# Altium PCB Liniar Power Source.PcbDoc
Units mil, origin at the board's own origin, x right, y up, seen from the top; angles counter-clockwise.
Board outline 3750 x 3500 mil, 2 copper layers (Top Layer, Bottom Layer); 28 components, 11 nets, 66 pads, 6 vias.
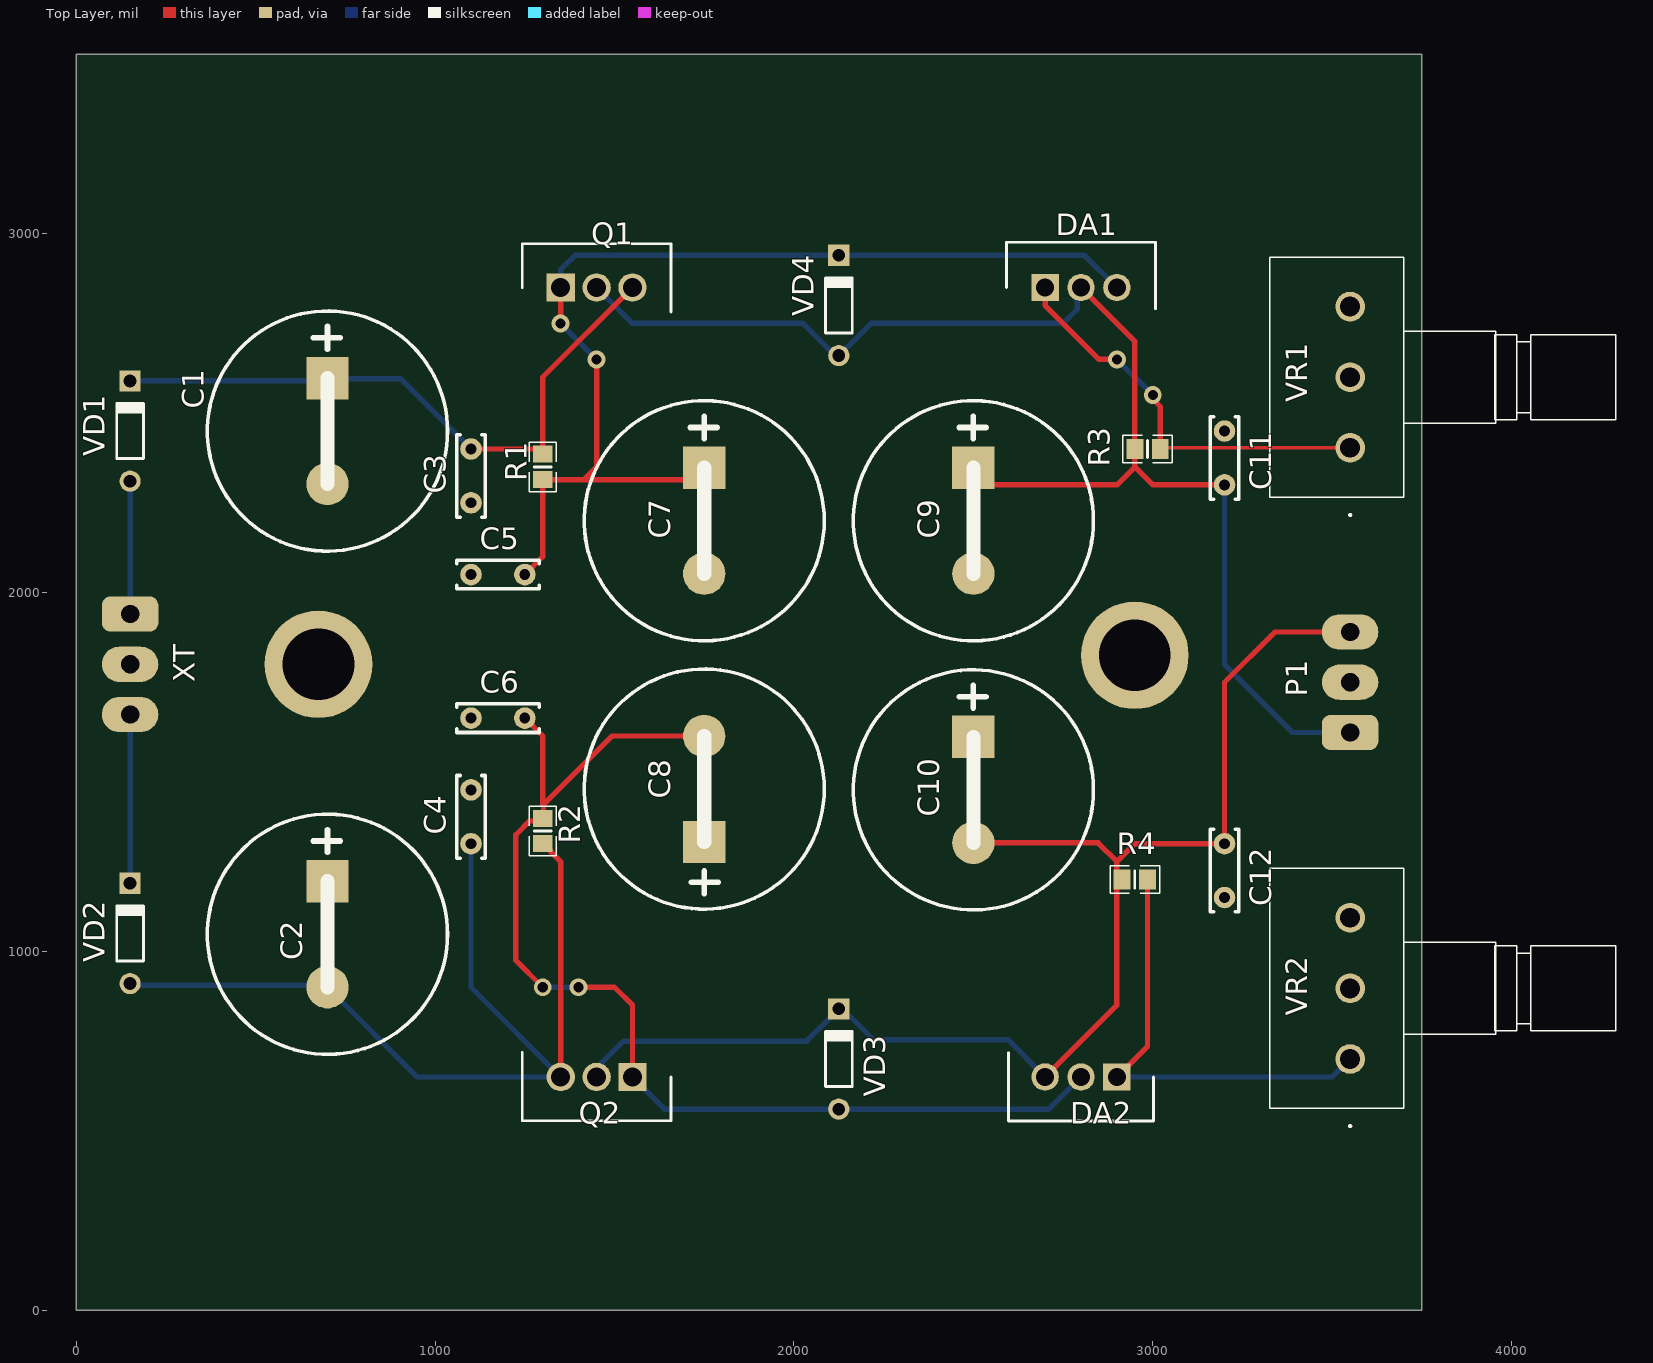
[diagram p0: Top Layer view]
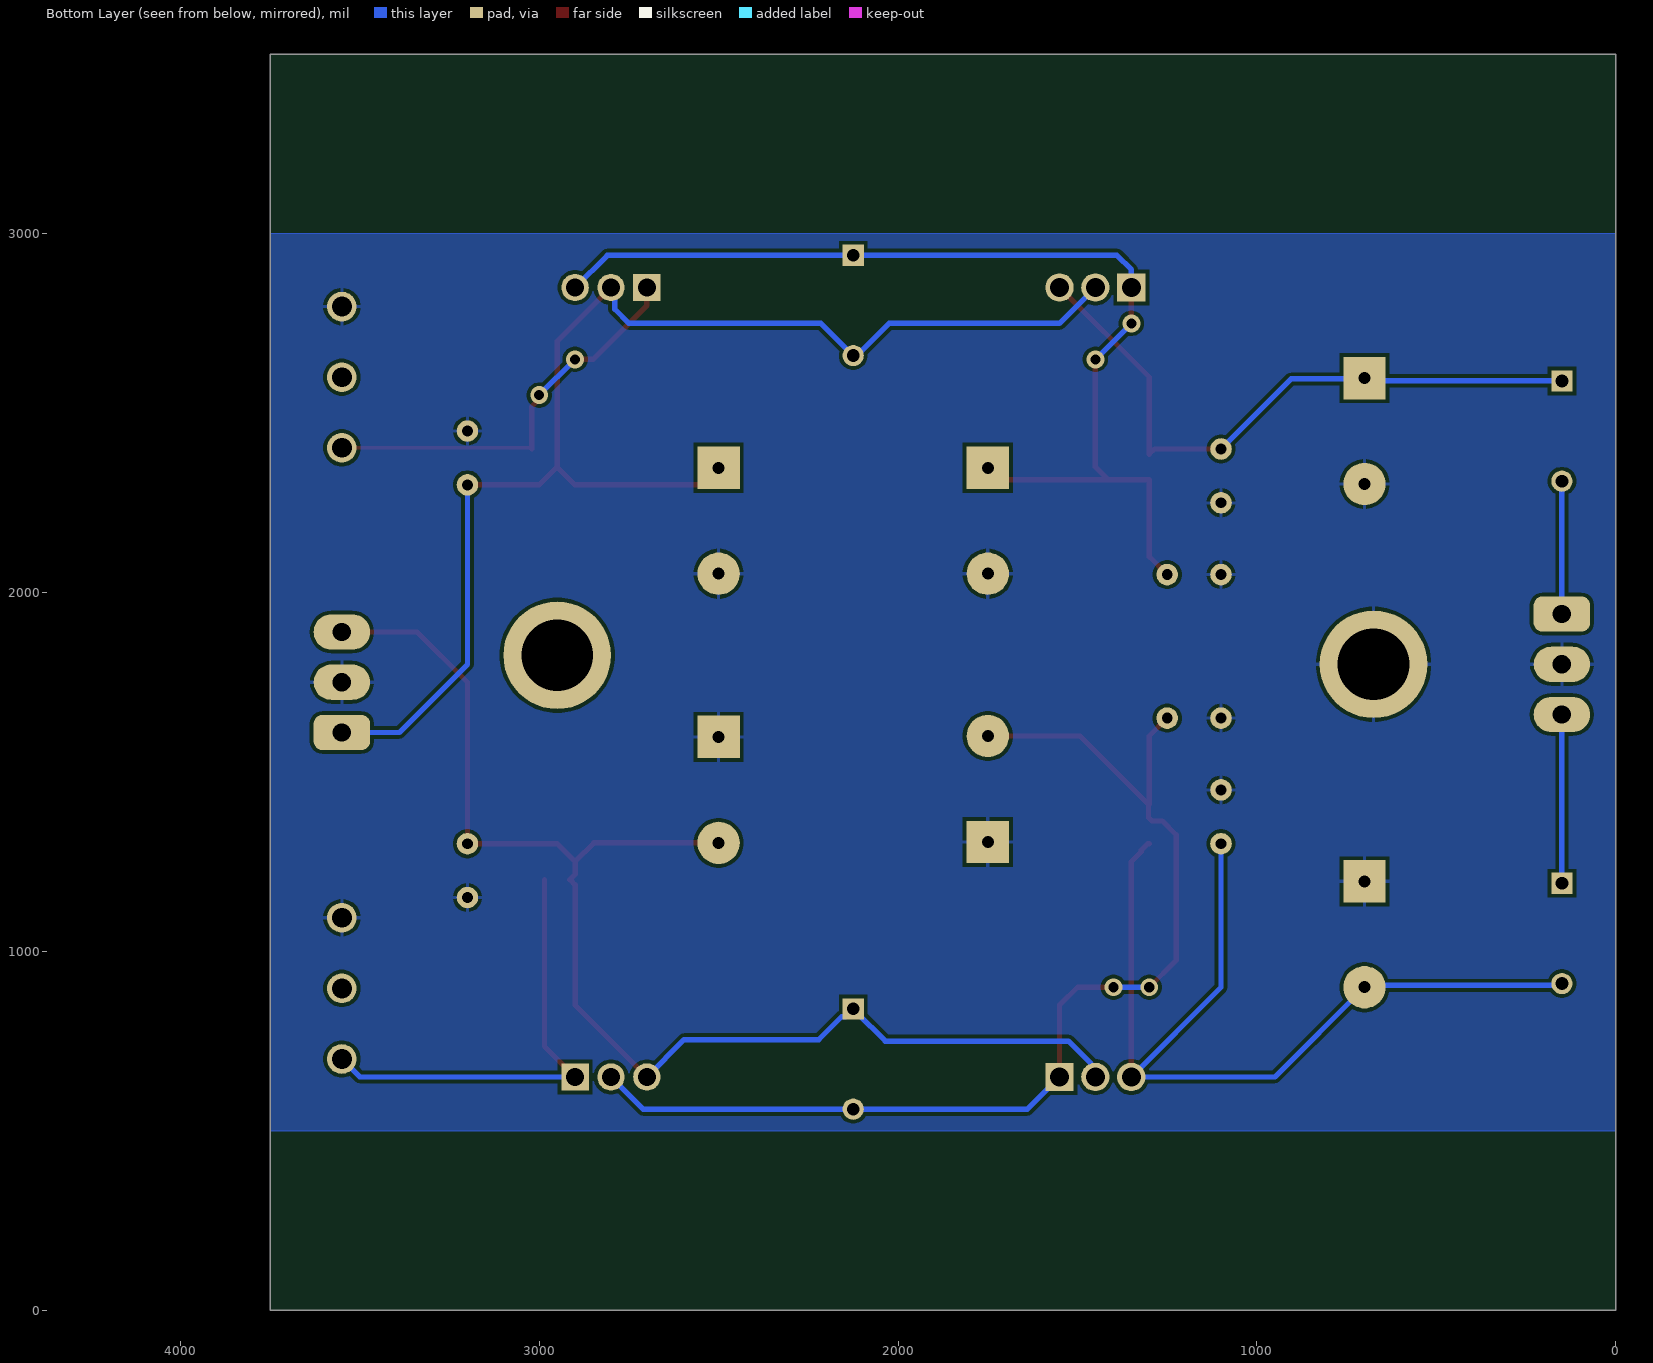
[diagram p1: Bottom Layer view, seen from below]
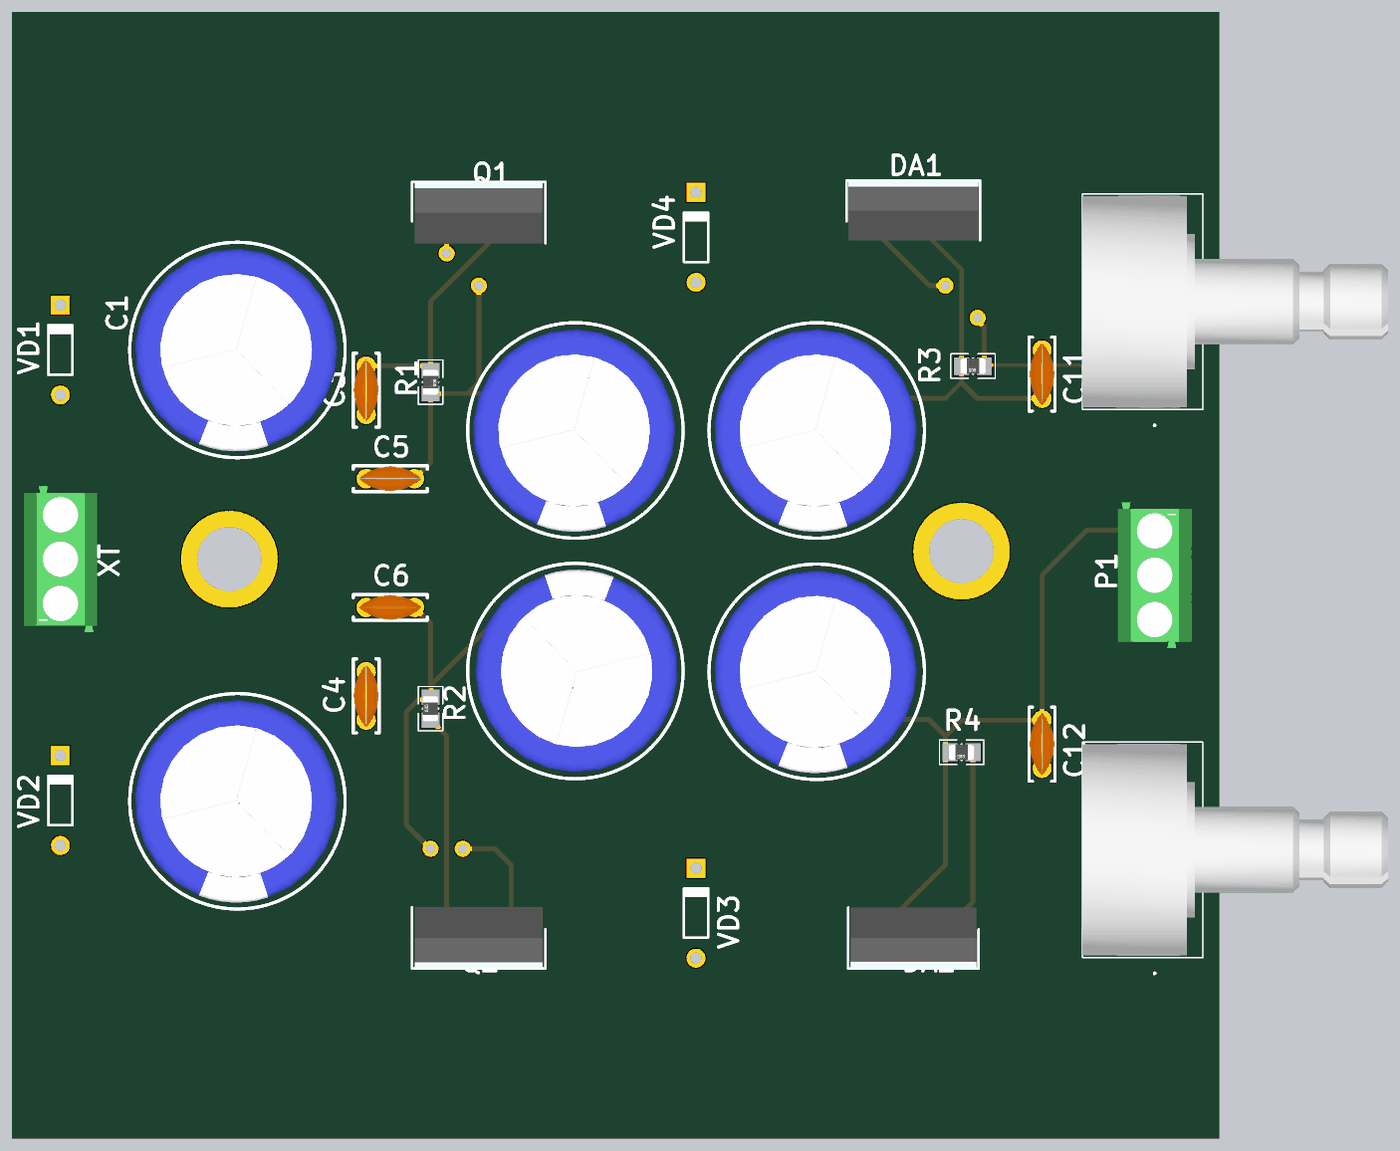
[diagram p2: 3D render of the assembled board from above, using the file's embedded part models]

## Layer stack, top to bottom
Top Solder: solder mask 0.4, Solder Resist, Dk 3.5
Top Layer: signal copper 1.4
Dielectric 1: dielectric 12.6, FR-4, Dk 4.8
Bottom Layer: signal copper 1.4
Bottom Solder: solder mask 0.4, Solder Resist, Dk 3.5

## Board outline
0,0 3750,0 3750,3500 0,3500

## Design rules (kind name [scope] priority, off if disabled: settings)
Clearance [All] p1: gap=10 ignorepadtopadclearanceinfootprint=FALSE except(0: Arc-Hole Track-Hole SMDPad-Hole THPad-Hole Via-Hole Fill-Hole Poly-Hole Region-Hole Text-Hole)
PolygonConnect [All] p1: connectstyle=Relief reliefconductorwidth=10 reliefentries=4 polygonreliefangle="90 Angle" airgapwidth=10
RoutingVias [All] p1: holewidth=28 width=50 viastyle="Through Hole" minholewidth=28 minwidth=50 maxholewidth=28 maxwidth=50
SolderMaskExpansion [All] p1: expansion=4 istentingtop=FALSE
Width [All] p1: maxlimit=39.37 minlimit=9.84 preferedwidth=20
30 further rules are at their usual default settings.

## Components (designator, comment, footprint, x,y, rotation, side; value= is the part's Value field where it differs from the comment)
C1 "3300uF/25V" "Cap electrolitic radial 16x25 B" 700,2450 r270 top
C2 "3300uF/25V" "Cap electrolitic radial 16x25 B" 700,1047.64 r270 top
C3 "C104" "CAP CER 5x3x75mm" 1100,2250 r90 top
C4 "C104" "CAP CER 5x3x75mm" 1100,1300 r90 top
C5 "C104" "CAP CER 5x3x75mm" 1100,2050 r0 top
C6 "C104" "CAP CER 5x3x75mm" 1250,1650 r180 top
C7 "3300uF/25V" "Cap electrolitic radial 16x25 B" 1750,2200 r270 top
C8 "3300uF/25V" "Cap electrolitic radial 16x25 B" 1750,1452.36 r90 top
C9 "3300uF/25V" "Cap electrolitic radial 16x25 B" 2500,2200 r270 top
C10 "3300uF/25V" "Cap electrolitic radial 16x25 B" 2500,1450 r270 top
C11 "C104" "CAP CER 5x3x75mm" 3200,2450 r270 top
C12 "C104" "CAP CER 5x3x75mm" 3200,1300 r270 top
DA1 "LM317AT_NOPB" TO254P470X1028X1955-3P 2700,2850 r0 top
DA2 "LM337BTG" TO254P482X997X2018-3P 2900,650 r180 top
P1 "DG350-3.5-3" DG350-3.5-3 3550,1750 r0 top
Q1 "TIP42" TO254P483X1010X2035-3P 1350,2850 r0 top
Q2 "TIP41C" TO254P483X1010X2035-3P 1550,650 r180 top
R1 "240" RESC2012(0805)N 1300,2350 r270 top
R2 "240" RESC2012(0805)N 1300,1335.43 r90 top
R3 "240" RESC2012(0805)N 2985.43,2400 r180 top
R4 "240" RESC2012(0805)N 2950,1200 r180 top
VD1 "1N4007" DO-35 150,2450 r90 top
VD2 "1N4007" DO-35 150,1050 r90 top
VD3 "1N4007" DO-35 2125,700 r90 top
VD4 "1N4007" DO-35 2125,2800 r90 top
VR1 "10K" P160KN0QC15B50K 3550,2403.15 r90 top
VR2 "10K" P160KN0QC15B50K 3550,700 r90 top
XT "DG350-3.5-3" DG350-3.5-3 150,1800 r180 top

## Footprints (in the part's own frame and the unit in brackets; to place one, negate y for a bottom-side part, rotate by r counter-clockwise, add the part's x,y. Pads: shape width x height; smd on the part's side, far side on the other; paste and mask are expansions set on the pad)
"CAP CER 5x3x75mm" [mil] "CAP CER 1000PF 500V 10% RADIAL"
  round 60 hole 30: 1(0,0) 2(150,0)
  silkscreen extent -40,-40 190,40, body extent -22,-39 172,39, height 294
"Cap electrolitic radial 16x25 B" [mm]
  rect 3x3 hole 0.85: 1(-3.75,0)
  round 3 hole 0.85: 2(3.75,0)
  silkscreen extent -8.5,-8.5 8.5,8.5, body extent -8,-8.1 8,7.9, height 25.8
DG350-3.5-3 [mm]
  rrect50% 4x2.5 hole 1.3: 1(0,-3.556)
  oval 4x2.5 hole 1.3: 2(0,0) 3(0,3.556)
  body extent -2.9,-5.75 2.9,5.75, height 8.4
DO-35 [mm] "Diode, Axial; Body 3.8 x 1.9 mm (LxDia. max), Lead Dia. 0.53 mm (max)"
  round 1.5 hole 0.9: 1(-3.55,0)
  rect 1.5x1.5 hole 0.9: 2(3.55,0)
  silkscreen extent -1.95,-0.95 2.05,0.95
P160KN0QC15B50K [mm]
  round 2.1 hole 1.4: 1(0,0) 2(5,0) 3(10,0)
  silkscreen extent -4.8,-18.8 13.5,5.7, body extent -3.38,-18.41 13.38,5.72, height 21.38
RESC2012(0805)N [mm] "Chip Resistor, Body 2.0x1.3mm, IPC Medium Density"
  rect 1.2x1.4 smd: 1(-0.9,0) 2(0.9,0)
  silkscreen extent -1.75,-0.97 1.75,0.97, body extent -1,-0.62 1,0.64, height 0.78
TO254P470X1028X1955-3P [mm]
  rect 1.935x1.935 hole 1.29: 1(0,0)
  round 1.935 hole 1.29: 2(2.54,0) 3(5.08,0)
  silkscreen extent -2.73,-1.5 7.81,3.2, body extent -2.6,-1.5 7.68,3.2, height 18.66
TO254P482X997X2018-3P [mm]
  rect 1.935x1.935 hole 1.29: 1(0,0)
  round 1.935 hole 1.29: 2(2.54,0) 3(5.08,0)
  silkscreen extent -2.6,-1.71 7.68,3.11, body extent -2.44,-1.71 7.52,3.11, height 18.48
TO254P483X1010X2035-3P [mm]
  rect 2.01x2.01 hole 1.34: 1(0,0)
  round 2.01 hole 1.34: 2(2.54,0) 3(5.08,0)
  silkscreen extent -2.73,-1.74 7.81,3.1, body extent -2.51,-1.74 7.59,3.1, height 18.56

## Part data
C1 C2 C7 C8 C9 C10: library part "Cap electrolitic radial 16x25", Part Number="Cap electrolitic radial 16x25"
C3 C4 C5 C6 C11 C12: library part "CAP CER RADIAL", Part Number="CAP CER RADIAL"
DA1: "Integrated Circuit", Arrow Part Number=LM317AT/NOPB, Manufacturer_Name="Texas Instruments", Mouser Part Number=926-LM317AT/NOPB, Arrow Price/Stock=https://www.arrow.com/en/products/lm317atnopb/texas-instruments, Datasheet Link=http://www.ti.com/lit/gpn/lm317a, Height=4.7mm, Manufacturer_Part_Number=LM317AT/NOPB, Mouser Price/Stock=https://www.mouser.co.uk/ProductDetail/Texas-Instruments/LM317AT-NOPB?qs=X1J7HmVL2ZFYFJRcNgsWcQ%3D%3D, Part Number=LM317AT_NOPB
DA2: "Integrated Circuit", Manufacturer_Name="ON Semiconductor", Mouser Part Number=863-LM337BTG, Arrow Part Number=LM337BTG, Arrow Price/Stock=https://www.arrow.com/en/products/lm337btg/on-semiconductor, Datasheet Link=http://www.onsemi.com/pub/Collateral/LM337-D.PDF, Height=4.82mm, Manufacturer_Part_Number=LM337BTG, Mouser Price/Stock=https://www.mouser.co.uk/ProductDetail/ON-Semiconductor/LM337BTG?qs=2OtswVQKCOGoOfwNKxF%2F1w%3D%3D, Part Number=LM337BTG
Q1: "Transistor BJT PNP", Manufacturer_Name="ON Semiconductor", Mouser Part Number=512-TIP42, Datasheet Link=http://www.onsemi.com/pub/Collateral/TIP41A-D.PDF, Height=4.83mm, Manufacturer_Part_Number=TIP42, Mouser Price/Stock=https://www.mouser.co.uk/ProductDetail/ON-Semiconductor-Fairchild/TIP42?qs=ljbEvF4DwOPva3Veot79WQ%3D%3D
Q2: "Transistor BJT NPN", Manufacturer_Name="ON Semiconductor", Mouser Part Number=512-TIP41C, Arrow Part Number=TIP41C, Arrow Price/Stock=https://www.arrow.com/en/products/tip41c/on-semiconductor, Datasheet Link=http://www.onsemi.com/pub/Collateral/TIP41A-D.PDF, Height=4.83mm, Manufacturer_Part_Number=TIP41C, Mouser Price/Stock=https://www.mouser.co.uk/ProductDetail/ON-Semiconductor-Fairchild/TIP41C?qs=ljbEvF4DwONP6g8z%252BtNuIA%3D%3D
R1 R2 R3 R4: library part RESC2012(0805), Package=0805, Part Number=RESC2012(0805)
VD1 VD2 VD3 VD4: library part 1N4148, "Small Signal Diode", Part Number=1N4148
VR1 VR2: library part P160KN-0QC15B50K, "Variable Resistor", Manufacturer_Name="BI Technologies", Mouser Part Number=858-P160KN-0QC15B50K, Arrow Part Number=P160KN-0QC15B50K, Arrow Price/Stock=https://www.arrow.com/en/products/p160kn-0qc15b50k/bi-technologies, Datasheet Link=https://componentsearchengine.com/Datasheets/1/P160KN-0QC15B50K.pdf, Height=20.75mm, Manufacturer_Part_Number=P160KN-0QC15B50K, Mouser Price/Stock=https://www.mouser.com/Search/Refine.aspx?Keyword=858-P160KN-0QC15B50K, Part Number=P160KN-0QC15B50K
P1 XT: Part Number=DG350-3.5-3

## Free pads (board coordinates)
  round 300 hole 200: 3(675,1800) 3(2950,1825)

## Via types
v1: diameter 50, hole 28, Top Layer to Bottom Layer, 6 vias

## Nets (pads, with @x,y where several pads share a name; then routed paths per layer and width w, separated by ;. In a path a pad name is that pad's centre, name@x,y a point inside that pad or via, vN(x,y) a via of type N, cw(c..) or ccw(c..) an arc to the next point about the centre after c; other vN are vias at no path point)
GND: C1.2 C2.1 C3.1 C4.2 C5.1 C6.2 C7.2 C8.1 C9.2 C10.1 C11.1 C12.2 P1.2 pad.3@675,1800 VR1.3 VR2.3 XT.2
NetC1_1: C1.1 C3.2 Q1.3 R1.1 VD1.2 | length 1808.6
  Top Layer w15: C3.2 1285.43,2400 R1.1 1300,2600 Q1.3
  Bottom Layer w15: VD1.2 692.13,2589.76 C1.1 ; C1.1@701.18,2598.82 704.72,2595.28 904.72,2595.28 C3.2
NetC2_2: C2.2 C4.1 Q2.3 R2.1 VD2.1 | length 2734.4
  Top Layer w15: R2.1 1303.94,1300 1322.56,1281.38 1322.56,1277.44 1350,1250 Q2.3
  Bottom Layer w15: VD2.1 155.12,905.12 694.88,905.12 C2.2 950,650 Q2.3 1100,900 C4.1
NetC5_2: C5.2 C7.1 DA1.3 Q1.1 R1.2 VD4.2 | length 2994.2
  Top Layer w15: C5.2 1300,2100 R1.2 1414.57,2314.57 ; v1(1350,2750) Q1.1 ; v1(1450,2650) 1450,2350 1414.57,2314.57 ; C7.1 1716.93,2314.57 1414.57,2314.57
  Bottom Layer w15: v1(1350,2750) v1(1450,2650) ; Q1.1 1350,2900 1389.76,2939.76 VD4.2 2810.24,2939.76 DA1.3
NetC6_1: C6.1 C8.2 DA2.2 Q2.1 R2.2 VD3.1 | length 3172.7
  Top Layer w15: C6.1 1300,1600 1300,1409.49 ; v1(1300,900) 1225,975 1225,1325 1263.3,1363.3 1292.43,1363.3 1301.97,1372.83 1301.97,1409.49 1492.48,1600 C8.2 ; v1(1400,900) 1500,900 1550,850 Q2.1
  Bottom Layer w15: v1(1300,900) v1(1400,900) ; Q2.1 1639.76,560.24 2710.24,560.24 DA2.2
NetC9_1: C9.1 C11.2 DA1.2 P1.1 Q1.2 R3.2 VD4.1 | length 3792.9
  Top Layer w15: C9.1 2547.64,2300 2900,2300 2950,2350 ; DA1.2@2796.91,2853.09 DA1.2 2950,2700 R3.2 2950,2350 ; C11.2 3000,2300 2950,2350
  Bottom Layer w15: Q1.2 1550,2750 2025,2750 2114.76,2660.24 VD4.1 2214.76,2750 2750,2750 2789.41,2789.41 2789.41,2839.41 DA1.2 ; C11.2 3200,1800 3390,1610 P1.1
NetC10_2: C10.2 C12.1 DA2.3 P1.3 Q2.2 R4.2 VD3.2 | length 3746.7
  Top Layer w15: C10.2 2847.64,1302.36 2900,1250 ; DA2.3 2900,850 2900,1185.43 R4.2 2900,1214.57 2900,1250 ; P1.3 3340,1890 3200,1750 C12.1 2950,1300 2900,1250
  Bottom Layer w15: Q2.2 1462.27,662.27 1462.27,687.27 1525,750 2035.24,750 2115.43,830.19 2120.21,834.98 VD3.2 2147.03,817.74 2157.26,817.74 2221.05,753.95 2596.05,753.95 DA2.3 ; P1.3@3520.47,1890 P1.3
NetDA1_1: DA1.1 R3.1 VR1.1 | length 1140.5
  Top Layer w10: R3.1@3021.65,2403.15 VR1.1
  Top Layer w15: DA1.1 2700,2800 2850,2650 v1(2900,2650) ; v1(3000,2550) 3000,2539.18 3020.87,2518.31 R3.1
  Bottom Layer w15: v1(2900,2650) v1(3000,2550)
NetDA2_1: DA2.1 R4.1 VR2.1 | length 1256.1
  Top Layer w15: DA2.1 2985.43,735.43 R4.1
  Bottom Layer w15: DA2.1 3500,650 VR2.1
NetVD1_1: VD1.1 XT.1 | length 370.2
  Bottom Layer w15: XT.1 VD1.1
NetVD2_2: VD2.2 XT.3 | length 470.2
  Bottom Layer w15: VD2.2 XT.3
pads on no net: VR1.2 VR2.2

## Polygon pours and split planes (outlines as drawn)
GND on Bottom Layer "GND_L02_P002" (solid, remove dead copper, pour order 2): 3750,3000 0,3000 0,500 3750,500
GND on Bottom Layer "NONET_L02_P000" (solid, remove dead copper, shelved, pour order 0): 3750,3000 3750,500 0,500 0,3000